# Altium PCB HEBoard_pcb.PcbDoc
Units mm, origin at the board's own origin, x right, y up, seen from the top; angles counter-clockwise.
Board outline 152.4 x 101.6 mm, 2 copper layers (Top Layer, Bottom Layer); 20 components, 14 nets, 99 pads, 16 vias.
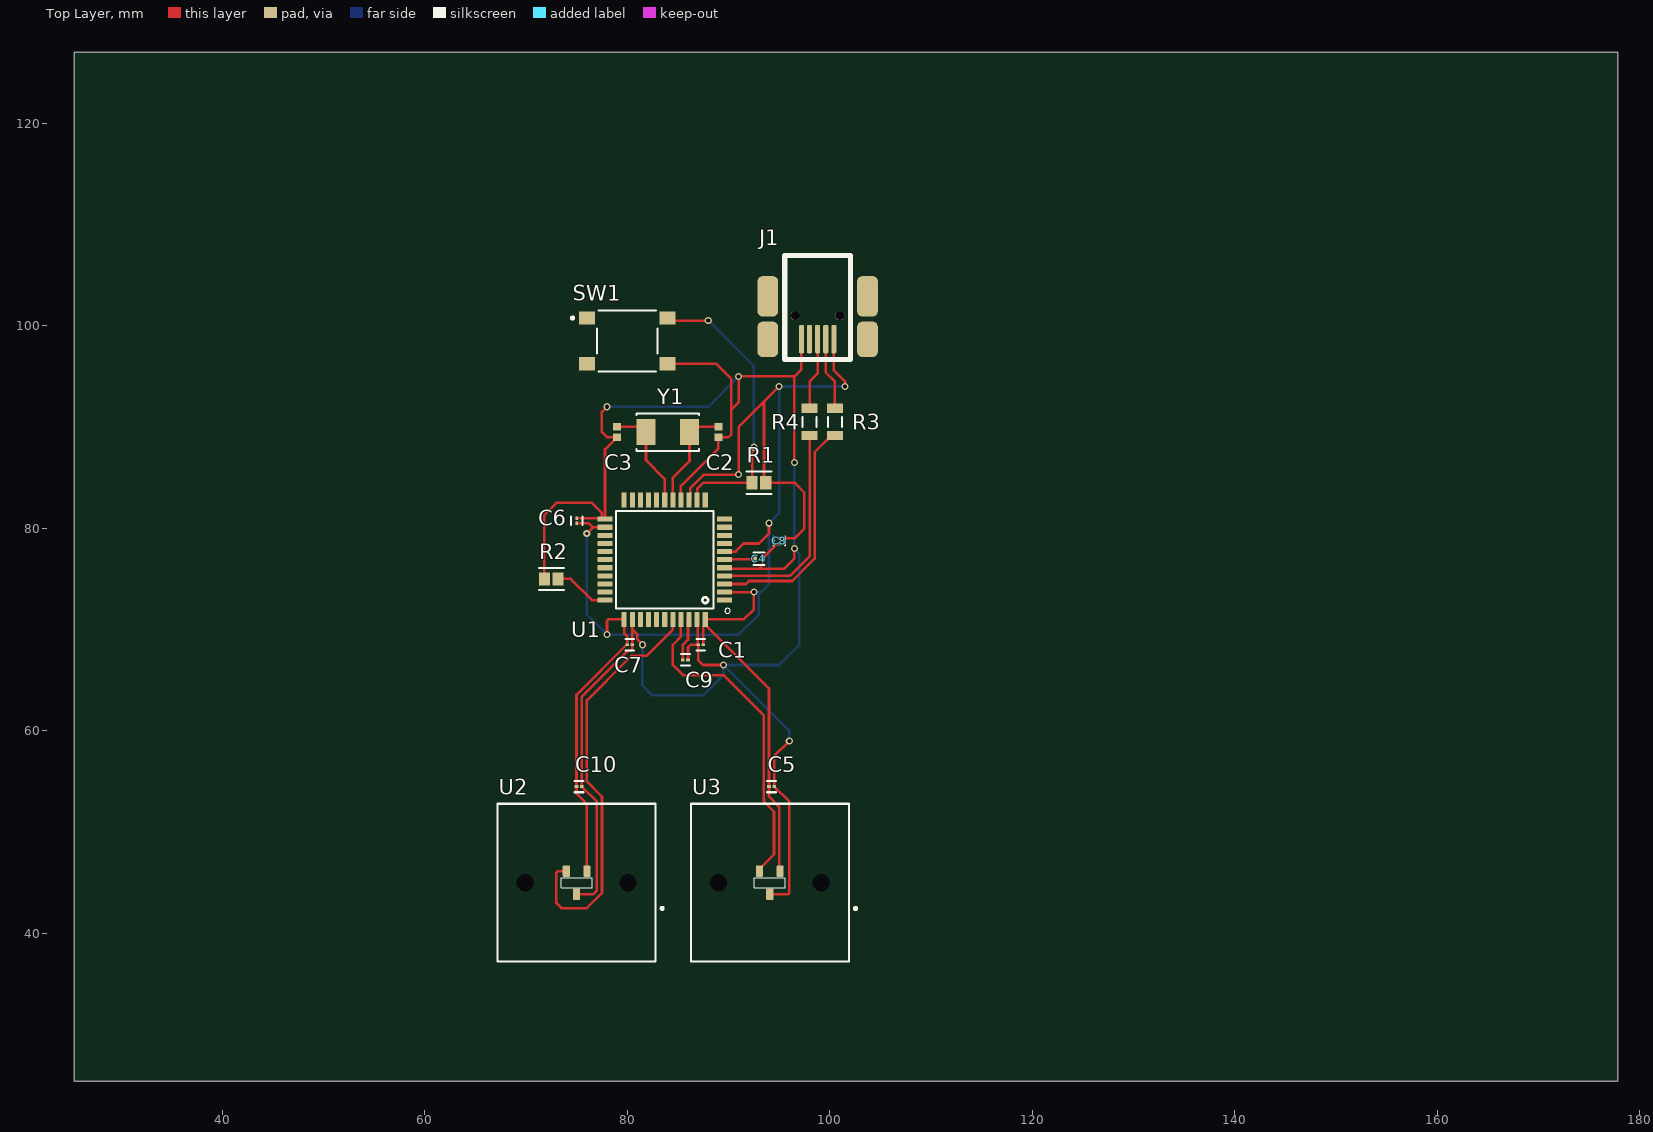
[diagram p0: Top Layer view]
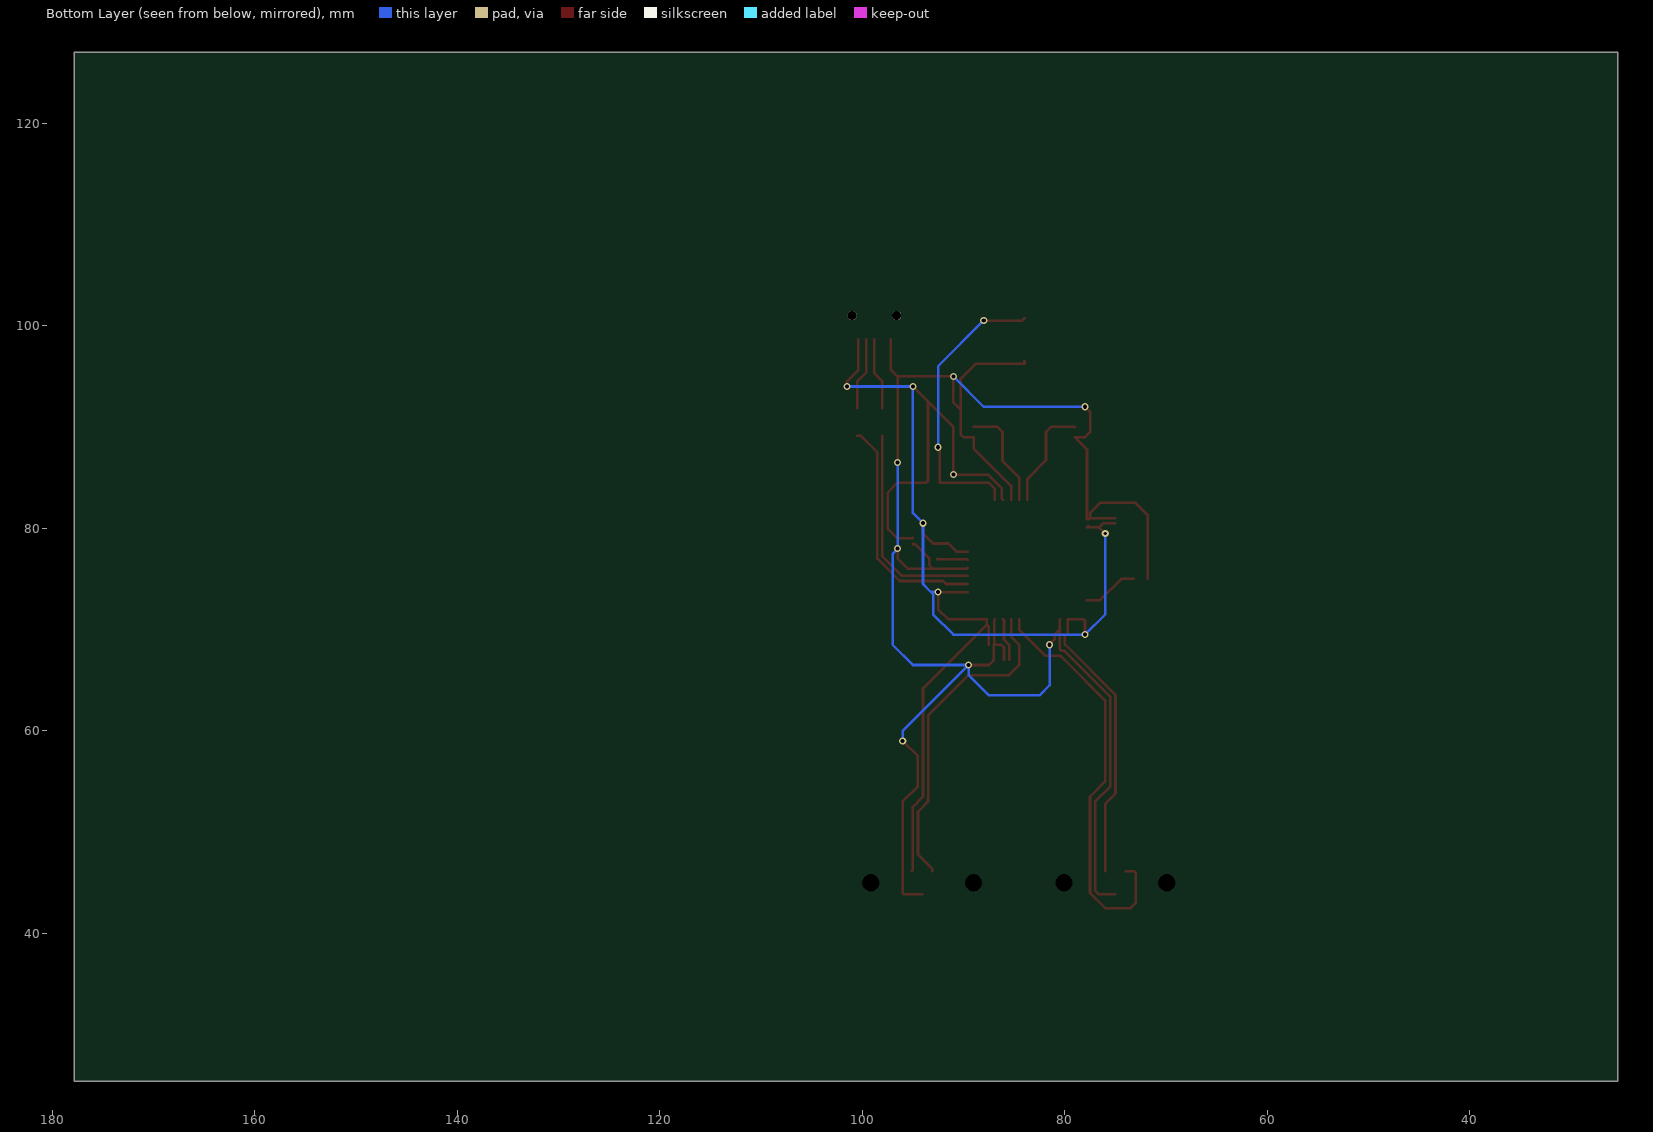
[diagram p1: Bottom Layer view, seen from below]
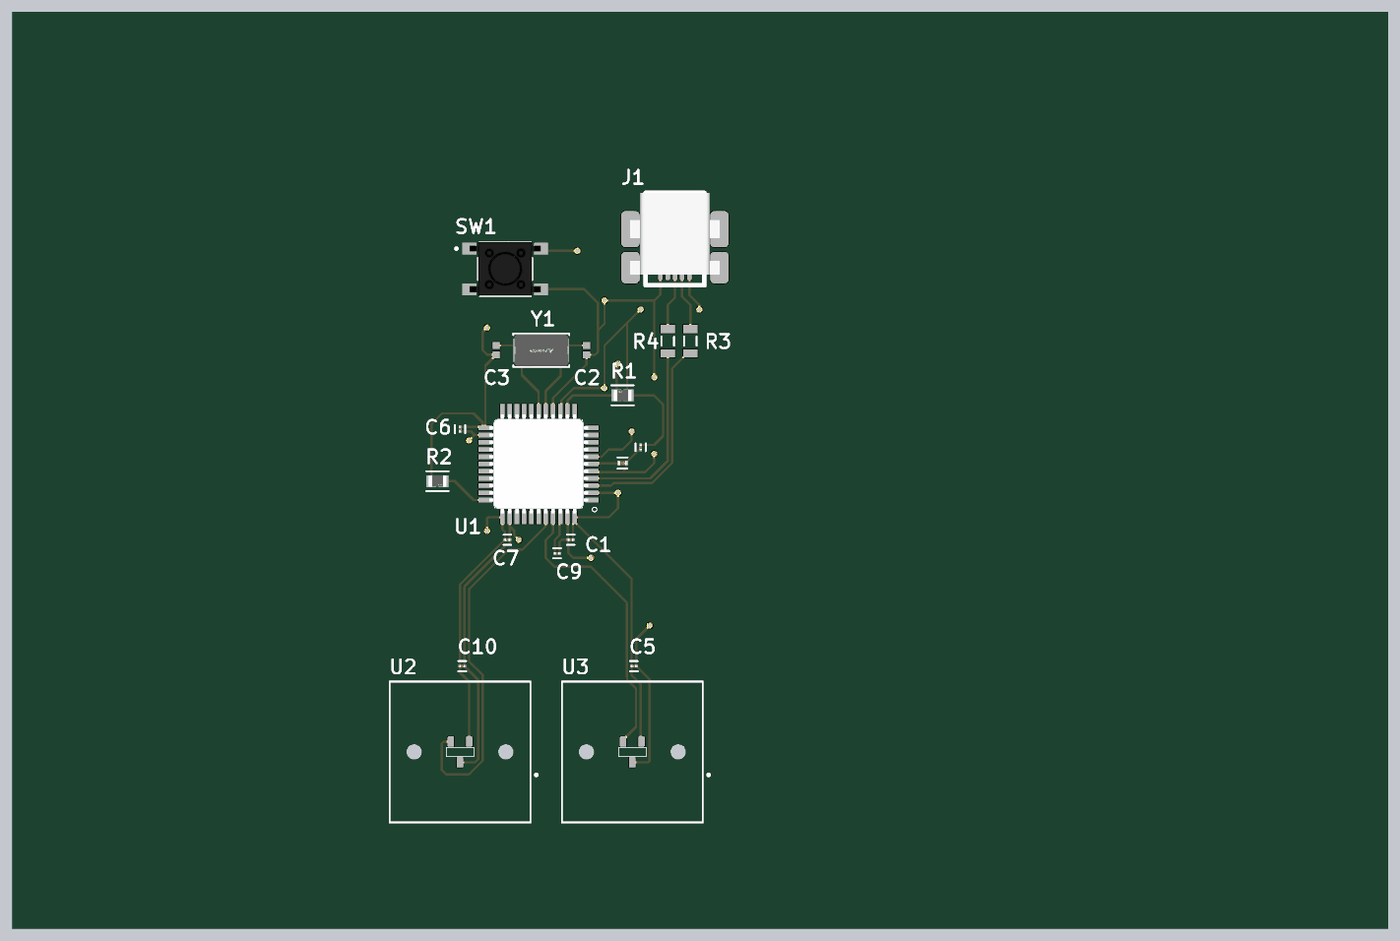
[diagram p2: 3D render of the assembled board from above, using the file's embedded part models]

## Layer stack, top to bottom
Top Solder: solder mask 0.0102, Solder Resist, Dk 3.5
Top Layer: signal copper 0.0356
Dielectric 1: dielectric 0.32, FR-4, Dk 4.8
Bottom Layer: signal copper 0.0356
Bottom Solder: solder mask 0.0102, Solder Resist, Dk 3.5

## Board outline
25.4,25.4 177.8,25.4 177.8,127 25.4,127

## Design rules (kind name [scope] priority, off if disabled: settings)
Clearance Clearance_3 [All] p1: gap=0.254 ignorepadtopadclearanceinfootprint=FALSE except(0: Arc-Hole Track-Hole SMDPad-Hole THPad-Hole Via-Hole Fill-Hole Poly-Hole Region-Hole Text-Hole; 0.154: Arc-SMDPad Track-SMDPad SMDPad-SMDPad)
Clearance Clearance_2 [All] p2: gap=0.254 ignorepadtopadclearanceinfootprint=FALSE except(0: Arc-Hole Track-Hole SMDPad-Hole THPad-Hole Via-Hole Fill-Hole Poly-Hole Region-Hole Text-Hole)
Clearance Clearance_1 [All] p3: gap=0.254 ignorepadtopadclearanceinfootprint=FALSE except(0: Arc-Hole Track-Hole SMDPad-Hole THPad-Hole Via-Hole Fill-Hole Poly-Hole Region-Hole Text-Hole; 0.154: Arc-SMDPad Track-SMDPad SMDPad-SMDPad)
Clearance [All] p4: gap=0.254 ignorepadtopadclearanceinfootprint=FALSE except(0: Arc-Hole Track-Hole SMDPad-Hole THPad-Hole Via-Hole Fill-Hole Poly-Hole Region-Hole Text-Hole)
MinimumSolderMaskSliver MinimumSolderMaskSliver_1 [All] p1: minsoldermaskwidth=0.07
MinimumSolderMaskSliver [All] p2: minsoldermaskwidth=0.254
PolygonConnect [All] p1: connectstyle=Relief reliefconductorwidth=0.254 reliefentries=4 polygonreliefangle="90 Angle" airgapwidth=0.254
RoutingVias [All] p1: holewidth=0.711 width=1.27 viastyle="Through Hole" minholewidth=0.711 minwidth=1.27 maxholewidth=0.711 maxwidth=1.27
SilkToSolderMaskClearance [IsPad] p1: minsilkscreentomaskgap=0.025 clearancetoexposedcopper=TRUE
SolderMaskExpansion [All] p1: expansion=0.102 istentingtop=FALSE
Width [InNet('+5V')] p1: maxlimit=0.5 minlimit=0.254 preferedwidth=0.3 bottomlayer_maxwidth=0.254 bottomlayer_prefwidth=0.254 minimp=50.000000 maximp=50.000000 favimp=50.000000
28 further rules are at their usual default settings.

## Components (designator, comment, footprint, x,y, rotation, side; value= is the part's Value field where it differs from the comment)
C1 "0.1uF" FP-GRM033-0_03-IPC_C 85.746,67 r0 top
C2 "22pF" CAPC1006X50X20ML10T10 89,89.5 r90 top
C3 "22pF" CAPC1006X50X20ML10T10 79,89.5 r90 top
C4 "1uF" FP-GRM15-0_1-MFG 93,77 r0 top
C5 "0.1uF" FP-GRM033-0_03-IPC_C 94.254,54.5 r0 top
C6 "0.1uF" FP-GRM033-0_03-IPC_C 75,80.746 r90 top
C7 "0.1uF" FP-GRM033-0_03-IPC_C 80.246,68.5 r0 top
C8 "0.1uF" FP-GRM033-0_03-IPC_C 95,78.746 r270 top
C9 "0.1uF" FP-GRM033-0_03-IPC_C 87.254,68.5 r180 top
C10 "0.1uF" FP-GRM033-0_03-IPC_C 75.246,54.5 r0 top
J1 "67503-1020" MOLX-67503-1020_V 100.4,98.675 r270 top
R1 "10k 0.25W" FP-RNCP0805-IPC_C 93,84.5 r0 top
R2 "10k 0.25W" FP-RNCP0805-IPC_C 72.5,75 r180 top
R3 "22R 1/4w" RESC3216X60X45LL10T20 100.5,90.5 r90 top
R4 "22R 1/4w" RESC3216X60X45LL10T20 98,90.5 r90 top
SW1 "" FP-PTS645SM43SMTR92LFS-MFG 80,98.5 r0 top
U1 "ATMEGA32U4-AU" QFP80P1200X1200X120-44N 83.7,76.9 r180 top
U2 "SS39ET" CHRY-MX1A-11NW_V 75,45 r180 top
U3 "SS39ET" CHRY-MX1A-11NW_V 94.08,45 r180 top
Y1 "16MHz 18pF" FP-ABM7-MFG 84,89.5 r180 top

## Footprints (in the part's own frame and the unit in brackets; to place one, negate y for a bottom-side part, rotate by r counter-clockwise, add the part's x,y. Pads: shape width x height; smd on the part's side, far side on the other; paste and mask are expansions set on the pad)
CAPC1006X50X20ML10T10 [mm] "Chip Capacitor, 2-Leads, Body 1.00x0.55mm, IPC Low Density"
  rect 0.74x0.8 smd: 1(-0.51,0) 2(0.51,0)
  body extent -0.55,-0.33 0.55,0.32, height 0.5
CHRY-MX1A-11NW_V [mil] "THD, 2-Leads, Body 15.6x15.6mm"
  rrect30% 28x45 smd: 1(-40,-45) 2(40,-45) 3(0,45)
  round 0 hole 67 unplated paste+0: MH2(-200,0) MH3(200,0)
  silkscreen extent -338,-307 307,307, body extent -307,-307 307,307, height 598
FP-ABM7-MFG [mm]
  rect 1.9x2.6 smd paste+0 mask+0: 1(-2.15,0) 2(2.15,0)
  silkscreen extent -3.1,-1.85 3.1,1.85, body extent -3.2,-1.95 3.2,1.95, height 0.25
FP-GRM15-0_1-MFG [mm]
  rect 0.4x0.5 smd paste+0 mask+0: 1(-0.4,0) 2(0.4,0)
  silkscreen extent -0.55,-0.63 0.55,0.63, body extent -0.7,-0.38 0.7,0.38, height 0.25
FP-GRM033-0_03-IPC_C [mm]
  rect 0.354x0.263 smd paste+0 mask+0: 1(-0.254,0) 2(0.254,0)
  silkscreen extent -0.43,-0.57 0.43,0.57, body extent -0.53,-0.27 0.53,0.27, height 0.25
FP-PTS645SM43SMTR92LFS-MFG [mm]
  rect 1.55x1.3 smd paste+0 mask+0: 1(-3.975,2.25) 2(3.975,2.25) 3(-3.975,-2.25) 4(3.975,-2.25)
  silkscreen extent -5.52,-3 3,3, body extent -4.85,-3.1 4.85,3.1, height 0.25
FP-RNCP0805-IPC_C [mm]
  rect 1.105x1.308 smd paste+0 mask+0: 1(-0.676,0) 2(0.676,0)
  silkscreen extent -1.23,-1.1 1.23,1.1, body extent -1.33,-0.8 1.33,0.8, height 0.25
MOLX-67503-1020_V [mm] "Mini USB Connector, SMT, Righer Angle"
  rrect50% 2.8x0.5 smd: 1(0,0) 2(0,-0.8) 3(0,-1.6) 4(0,-2.4) 5(0,-3.2)
  rrect50% 3.5x2.05 smd: 6(0.025,3.325) 8(0.025,-6.525)
  rrect50% 4x2.05 smd: 7(-4.225,3.325) 9(-4.225,-6.525)
  round 0.9 hole 0.9 unplated: X(-2.325,-3.8) Y(-2.325,0.6)
  silkscreen extent -8.25,-4.85 2,1.65, body extent -8.22,-6.56 0.78,3.34, height 3.95
QFP80P1200X1200X120-44N [mm]
  rect 1.5x0.5 smd: 1(-5.9,4) 2(-5.9,3.2) 3(-5.9,2.4) 4(-5.9,1.6) 5(-5.9,0.8) 6(-5.9,0) 7(-5.9,-0.8) 8(-5.9,-1.6) 9(-5.9,-2.4) 10(-5.9,-3.2) 11(-5.9,-4) 23(5.9,-4) 24(5.9,-3.2) 25(5.9,-2.4) 26(5.9,-1.6) 27(5.9,-0.8) 28(5.9,0) 29(5.9,0.8) 30(5.9,1.6) 31(5.9,2.4) 32(5.9,3.2) 33(5.9,4)
  rect 0.5x1.5 smd: 12(-4,-5.9) 13(-3.2,-5.9) 14(-2.4,-5.9) 15(-1.6,-5.9) 16(-0.8,-5.9) 17(0,-5.9) 18(0.8,-5.9) 19(1.6,-5.9) 20(2.4,-5.9) 21(3.2,-5.9) 22(4,-5.9) 34(4,5.9) 35(3.2,5.9) 36(2.4,5.9) 37(1.6,5.9) 38(0.8,5.9) 39(0,5.9) 40(-0.8,5.9) 41(-1.6,5.9) 42(-2.4,5.9) 43(-3.2,5.9) 44(-4,5.9)
  silkscreen extent -6.45,-4.8 4.8,5.3, body extent -6,-6 6,6, height 0.53
RESC3216X60X45LL10T20 [mm] "Chip Resistor, 2-Leads, Body 3.20x1.60mm, IPC High Density"
  rect 0.9x1.6 smd: 1(-1.35,0) 2(1.35,0)
  silkscreen extent -0.5,-0.7 0.5,0.7, body extent -1.65,-0.85 1.65,0.85, height 0.6

## Part data
C1 C5 C6 C7 C8 C9 C10: library part CMP-2010-01264-2, "Chip Multilayer Ceramic Capacitors for General Purpose, 0201, 0.10uF, X5R, 15%, 10%, 10V", Capacitance=100nF, Case Code (Imperial)=0201, Case Code (Metric)=0603, Dielectric=X5R, Max Operating Temperature=85°C, Min Operating Temperature=-55°C, Package Quantity=1, Tolerance=10%, Voltage=10V, Case/Package=0201, Depth=0.3mm, Height=0.3mm, Lead Free="Lead Free", Length=0.6mm, Mount="Surface Mount", Packaging="Tape and Reel", Radiation Hardening=No, REACH SVHC="No SVHC", Termination=SMD/SMT, Thickness=0.013inch, Voltage Rating=10V, Voltage Rating (DC)=10V, Weight=6E-06oz, Width=0.012inch
C2 C3: library part CMP-2008-04844-1, Manufacturer="AVX Interconnect / Elco", Part Number=0402ZK220GBSTR..
C4: library part CMP-2008-04556-2, "CAP CER 1UF 10V X5R 0402", Manufacturer=Murata, Manufacturer Part Number=GRM155R61A105KE15D, Package=GRM15-0.1, Temperature="-55°C to +85°C", Temperature Characteristic=X5R, Temperature Coefficient=15%, Temperature Range High=+85°C, Temperature Range Low=-55°C, Tolerance=10%, Voltage Rating=10V, Automotive=No, Capacitance=1uF, Category=Cap, ComponentLink2Description=Datasheet, ComponentLink2URL=https://search.murata.co.jp/Ceramy/image/img/A01X/G101/ENG/GRM155R61A105KE15-01A.pdf, Device Class L1="Passive Components", Device Class L2=Capacitors, Device Class L3="Ceramic Capacitors", Digikey Description="CAP CER 1UF 10V X5R 0402", Height=0.55mm, Ipc Land Pattern Name=CAPC10050X50, Lead Free=Yes, Material=Ceramic, Mouser Description="0402 1 uF 10 V ±10% Tolerance X5R Surface Mount Multilayer Ceramic Capacitor", Octopart=https://octopart.com/grm155r61a105ke15d-murata-197442, RoHS=TRUE
J1: library part CMP-0411-00002-1, "USB, MINI, SMD, RA KME04-USBMU03A01", Manufacturer=Molex, ComponentLink1Description="Manufacturer URL", ComponentLink1URL=http://www.molex.com/, ComponentLink2Description=Datasheet, ComponentLink2URL=http://www.molex.com/pdm_docs/sd/675031020_sd.pdf, DatasheetVersion="Rev F, 06/2009", Mounting Technology="Surface Mount", PackageDescription="Mini USB Connector, SMT, Righer Angle", PackageReference=67503-1020, PartNumber=67503-1020, Terminal Pitch="0.8 mm"
R1 R2: library part CMP-26527-007436-1, "10kΩ ±1% 0.25W 0805 High Power Anti-Sulfur Thin Film Chip Resistor", Case Code (Imperial)=0805, Case Code (Metric)=2012, Max Operating Temperature=155°C, Max Power Dissipation=250mW, Min Operating Temperature=-55°C, Resistance=10kR, Resistor Type="Thin Film", Temperature Coefficient=100ppm/°C, Tolerance=1%, Case/Package=0805, Features="Moisture Resistant", Height=0.024inch, Lead Free="Lead Free", Length=0.079inch, Mount="Surface Mount", Number of Terminations=2, Packaging="Tape and Reel", RoHS Compliant=Yes, Series=RNCP, Width=0.049inch
R3 R4: library part CMP-1014-00034-2, Manufacturer="Vishay Dale", Part Number=CRCW120622R0JNEA
SW1: library part CMP-2000-05160-2, "SWITCH TACTILE SPST-NO 0.05A 12V", Case/Package=SMD/SMT, Color=Black, Contact Resistance=100mR, Current Rating=50mA, Max Operating Temperature=60°C, Max Voltage Rating (DC)=12V, Min Operating Temperature=-20°C, Operating Force=160gf, Package Quantity=1, Actuator Length=0.85mm, Actuator Material=Nylon, Actuator Type=Standard, Contact Material=Silver, Contact Plating=Silver, Depth=9mm, Illumination Type=Non-Illuminated, Lead Free="Lead Free", Length=6mm, Max Current Rating=50mA, Mechanical Life=100000Cycles, Mount="Surface Mount", Orientation=Straight, Packaging="Tape and Reel", REACH SVHC="No SVHC", Switch Function=Off-Mom, Termination="Gull Wing", Throw Configuration=SPST, Voltage Rating (DC)=12V
U1: "AVR AVRÂ® ATmega Microcontroller IC 8-Bit 16MHz 32KB (16K x 16) FLASH 44-TQFP (10x10)", Package="TQFP-44 Microchip", Availability="In Stock", MF="Microchip Technology", MP=ATMEGA32U4-AU, Price=None, Purchase-URL=https://pricing.snapeda.com/search/part/ATMEGA32U4-AU/?ref=eda
U2 U3: "analog Hall Effect Sensor 1.5 mA 2.7 - 6.5 V dc", Package=None, Check_prices=https://www.snapeda.com/parts/SS39ET/Honeywell+Sensing+and+Productivity+Solutions/view-part/?ref=eda, MF="Honeywell Sensing and Productivity Solutions", MP=SS39ET, SnapEDA_Link=https://www.snapeda.com/parts/SS39ET/Honeywell+Sensing+and+Productivity+Solutions/view-part/?ref=snap
Y1: library part CMP-27762-000095-1, "Crystal 16MHz ±20ppm 18pF SMD-2 6mm x 3.5mm", Case/Package=CSMD, ESR (Equivalent Series Resistance)=50R, Frequency=16MHz, Frequency Stability=30ppm, Frequency Tolerance=20ppm, Load Capacitance=18pF, Max Operating Temperature=85°C, Min Operating Temperature=-40°C, Operating Frequency="16 MHz", Package Quantity=1000, Resistor Type=Ceramic, Depth=3.5mm, Height=0.055inch, Lead Free="Lead Free", Length=6mm, Mount="Surface Mount", Number of Pins=2, Packaging="Tape and Reel", Radiation Hardening=No, Series=ABM7, Termination=SMD/SMT, Tolerance=20ppm, Width=3.3mm

## Via types
v1: diameter 0.7, hole 0.4, Top Layer to Bottom Layer, 15 vias
v2: diameter 0.7, hole 0.3, Top Layer to Bottom Layer, 1 vias

## Nets (pads, with @x,y where several pads share a name; then routed paths per layer and width w, separated by ;. In a path a pad name is that pad's centre, name@x,y a point inside that pad or via, vN(x,y) a via of type N, cw(c..) or ccw(c..) an arc to the next point about the centre after c; other vN are vias at no path point)
+5V: C5.1 C6.1 C7.1 C8.1 C9.1 C10.1 J1.1 R1.2 U1.2 U1.7 U1.14 U1.24 U1.34 U1.44 U2.1 U3.1 | length 178.6
  Top Layer w0.254: C6.1 76.209,80.491 76.6,80.1 ; U2.1@76,46.159 U2.1 76.016,52.793 74.991,53.818 C10.1 74.991,63.546 79.946,68.5 C7.1 79.991,69.356 79.7,69.648 U1.34 78.149,71 78,70.851 v1(78,69.5) ; v2(76,79.5) 76.6,80.1 ; U1.24@77.677,80.223 U1.24 76.6,80.1 ; U1.14 86.213,82.913 86.213,83.931 87.582,85.3 v1(91,85.3) 91,90 93.5,92.5 ; C9.1 87.509,70.309 U1.44@87.7,70.5 ; U1.2 v1(92.5,73.7) 92.5,72 91.5,71 U1.44 U1.44@87.7,70.5 ; U1.7 90.7,77.7 91.5,78.5 93,78.5 94,79.5 v1(94,80.5) ; C8.1@95,79.046 C8.1 96.492,79 97.492,80 97.492,83.508 96.5,84.5 R1.2 93.5,84.676 93.5,92.5 ; v1(95,94) 93.5,92.5 ; U3.1 95,46.239 95,52.5 94,53.5 C5.1 94,64.2 U1.44@87.7,70.5 ; J1.1 100.4,95.6 101,95 101.5,94.5 v1(101.5,94)
  Bottom Layer w0.254: v2(76,79.5) 76,71.5 v1(78,69.5) 91,69.5 93,71.5 93,73.5 93.231,73.731 ; v1(92.5,73.7) 92.531,73.731 93.231,73.731 ; v1(101.5,94) v1(95,94) 95,81.5 v1(94,80.5) 94,74.5 93.231,73.731
D+: J1.3 R4.2 | length 7.2
  Top Layer w0.254: R4.2 98,94.5 98.8,95.3 J1.3
D-: J1.2 R3.2 | length 7.2
  Top Layer w0.254: J1.2 99.6,95.4 100.5,94.5 R3.2
GND: C1.2 C2.1 C3.1 C4.2 C5.2 C6.2 C7.2 C8.2 C9.2 C10.2 J1.5 R2.2 SW1.4 U1.5 U1.15 U1.23 U1.35 U1.43 U2.3 U3.3 | length 210.6
  Top Layer w0.254: R2.2 71.824,81.324 73,82.5 76.5,82.5 77.5,81.5 77.5,81.023 U1.23@77.524,80.999 ; U2.3 76.639,43.857 77,44.218 77,53 75.55,54.45 75.55,54.496 75.546,54.5 C10.2 75.5,63.336 80.082,67.918 80.351,67.918 80.5,68.067 C7.2 80.5,70 ; C6.2 U1.23@77.524,80.999 ; v1(78,92) 77.5,91.5 77.5,89.5 78,89 78.99,89 C3.1 78.97,88.99 78.727,88.747 78.727,88.717 77.8,87.79 U1.23 77.623,80.9 U1.23@77.524,80.999 ; U1.35 80.5,70 ; v1(81.5,68.5) 81.5,68.534 81,69.034 81,69.5 80.5,70 ; SW1.4@84,96.5 83.975,96.475 SW1.4 88.75,96.25 90.273,94.727 90.273,91.713 ; U1.15 85.3,84.173 89,87.873 C2.1 89.99,88.99 90.273,89.273 90.273,91.713 ; C1.2 86,68.242 86.258,68.5 C9.2@86.954,68.5 ; U1.43 86.95,70.95 86.95,68.504 C9.2@86.954,68.5 ; v1(89.5,66.5) 87.5,66.5 87,67 87,68.496 86.996,68.5 C9.2@86.954,68.5 ; U1.5 89.7,76 93,76 ; U3.3 95.857,43.857 96,44 96,53.009 94.559,54.45 94.559,54.496 94.554,54.5 C5.2 94.509,57.509 v1(96,59) ; C8.2 95,78.446 94.996,78.441 94.791,78.441 93.4,77.05 C4.2 93.4,76.4 93,76 ; v1(96.5,78) 96.5,77 95.5,76 93,76 ; v1(96.5,86.5) 96.5,95 ; J1.5 97.2,95.7 96.5,95 ; 90.273,91.713 91,92.44 v1(91,95) 96.5,95
  Bottom Layer w0.254: v1(78,92) 88,92 v1(91,95) ; v1(81.5,68.5) 81.5,64.5 82.5,63.5 87.5,63.5 89.5,65.5 v1(89.5,66.5) ; v1(96,59) 96,60 v1(89.5,66.5) ; v1(96.5,86.5) v1(96.5,78) 96.5,77.966 97,77.466 97,68.5 95,66.5 v1(89.5,66.5)
KEY_1: U1.40 U2.2 | length 41.4
  Top Layer w0.254: U2.2 73.149,46.143 73,45.994 73,43 73.5,42.5 76,42.5 77.508,44.008 77.508,53.492 76.008,54.992 76.008,63 80,66.992 80,67 80.41,67.41 81.91,67.41 84.5,70 U1.40
KEY_2: U1.41 U3.2 | length 32.3
  Top Layer w0.254: U1.41 85.3,69.3 84.5,68.5 84.5,66.5 85.5,65.5 89.492,65.5 93.492,61.5 93.492,53.29 93.5,53.282 93.5,53 94.492,52.008 94.492,47.787 93.064,46.359 U3.2
NetC1_1: C1.1 U1.42 | length 4.3
  Top Layer w0.254: C1.1 85.491,68.491 86,69 86,70.9 U1.42
NetC2_2: C2.2 U1.16 Y1.1 | length 10.5
  Top Layer w0.254: U1.16 84.5,85 86.138,86.638 86.15,86.638 Y1.1 86.66,90.01 C2.2
NetC3_2: C3.2 U1.17 Y1.2 | length 10.5
  Top Layer w0.254: C3.2@79.008,90.002 C3.2 81.34,90.01 Y1.2 81.85,86.739 83.7,84.888 U1.17
NetC4_1: C4.1 U1.6 | length 3
  Top Layer w0.254: U1.6 89.65,76.95 92.55,76.95 C4.1
NetR1_1: R1.1 SW1.2 U1.13 | length 28.8
  Top Layer w0.254: SW1.2 84.225,100.5 v1(88,100.5) ; U1.13 86.9,83.9 87.492,84.492 87.702,84.492 87.71,84.5 R1.1 92.324,87.703 92.5,87.879 v1(92.5,88)
  Bottom Layer w0.254: v1(88,100.5) 92.5,96 v1(92.5,88)
NetR2_1: R2.1 U1.33 | length 5.5
  Top Layer w0.254: R2.1 74.401,75 76.501,72.9 U1.33
NetR3_1: R3.1 U1.3 | length 23.1
  Top Layer w0.254: U1.3 91.708,74.5 92,74.792 96.292,74.792 98.508,77.008 98.508,87.508 100.15,89.15 R3.1
NetR4_1: R4.1 U1.4 | length 21.1
  Top Layer w0.254: U1.4 96.082,75.3 98,77.218 R4.1
pads on no net: J1.4 J1.6 J1.7 J1.8 J1.9 J1.X J1.Y SW1.1 SW1.3 U1.1 U1.8 U1.9 U1.10 U1.11 U1.12 U1.18 U1.19 U1.20 U1.21 U1.22 U1.25 U1.26 U1.27 U1.28 U1.29 U1.30 U1.31 U1.32 U1.36 U1.37 U1.38 U1.39 U2.MH2 U2.MH3 U3.MH2 U3.MH3